# Altium PCB UmbilicalBoardV4.PcbDoc (part 1 of 2)
Units mm, origin at the board's own origin, x right, y up, seen from the top; angles counter-clockwise.
Board outline 89.1 x 92.94 mm, 4 copper layers (Top Layer, GndPlane, PowerPlane, Bottom Layer), stack 0.107 mm thick; 73 components, 81 nets, 472 pads, 101 vias.
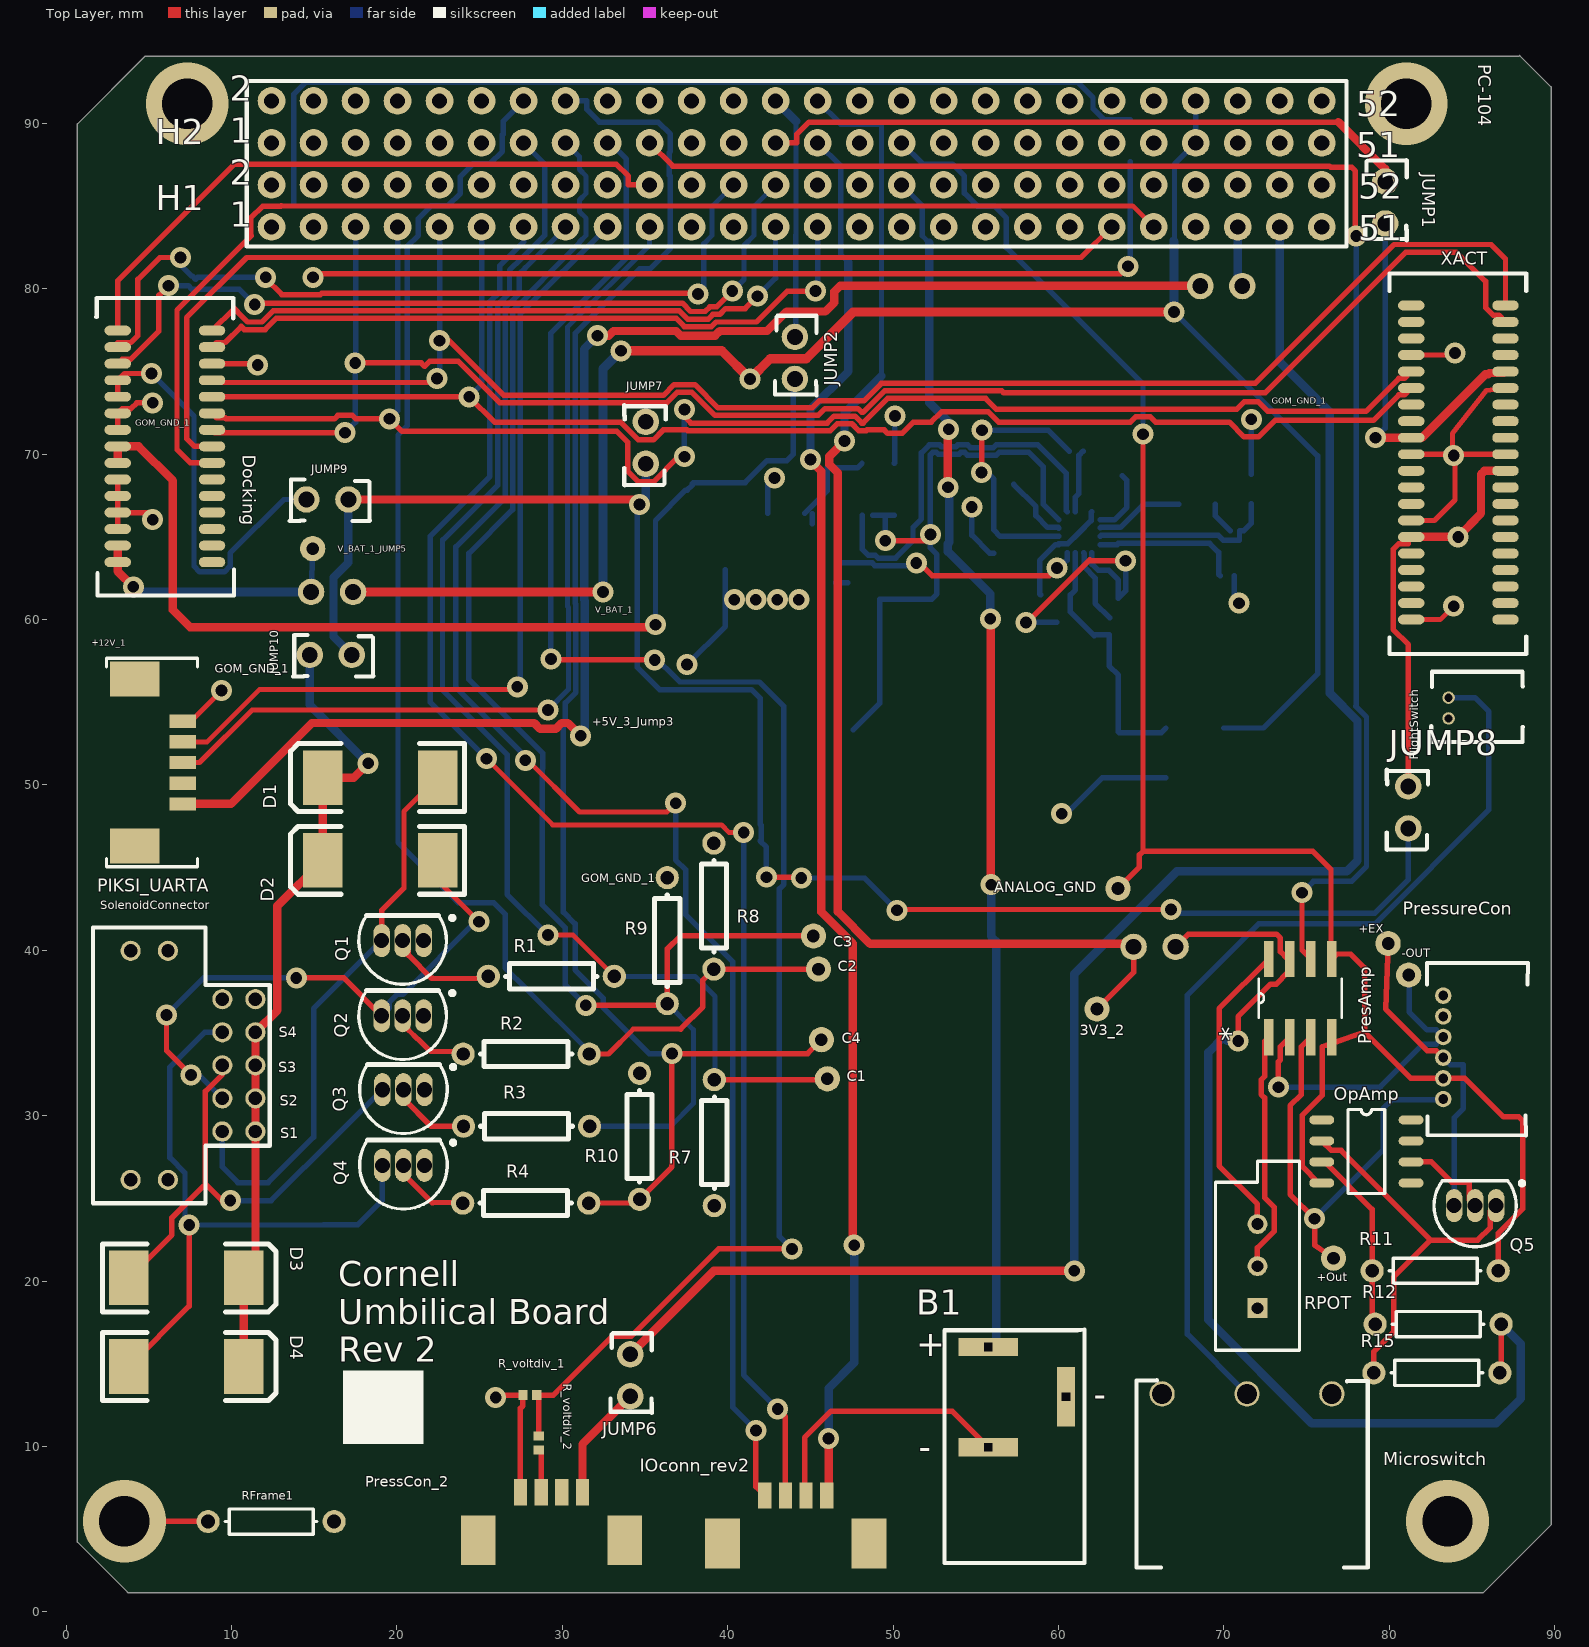
[diagram p0: Top Layer view]
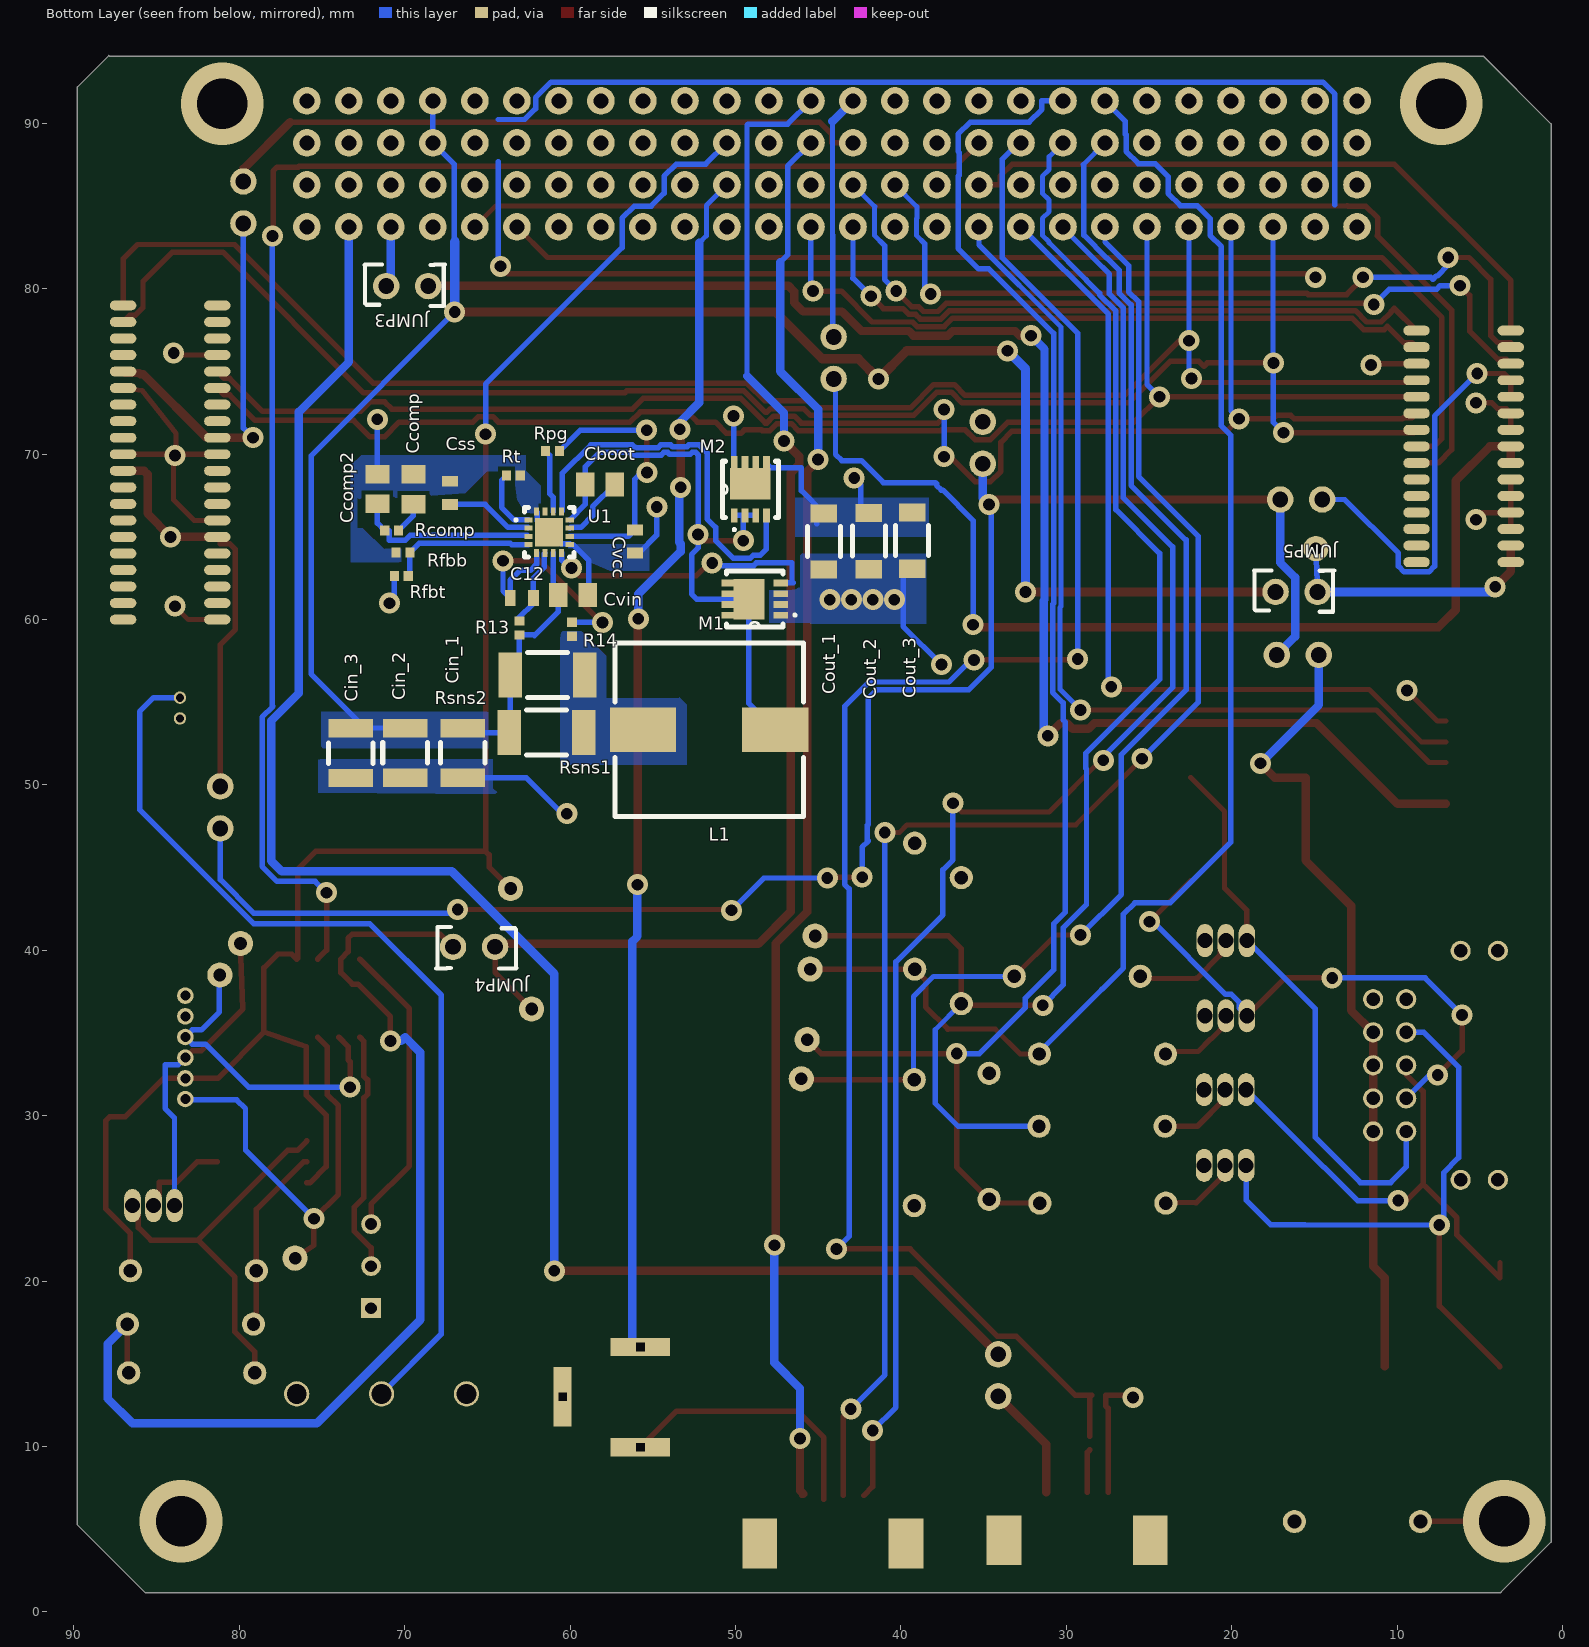
[diagram p1: Bottom Layer view, seen from below]
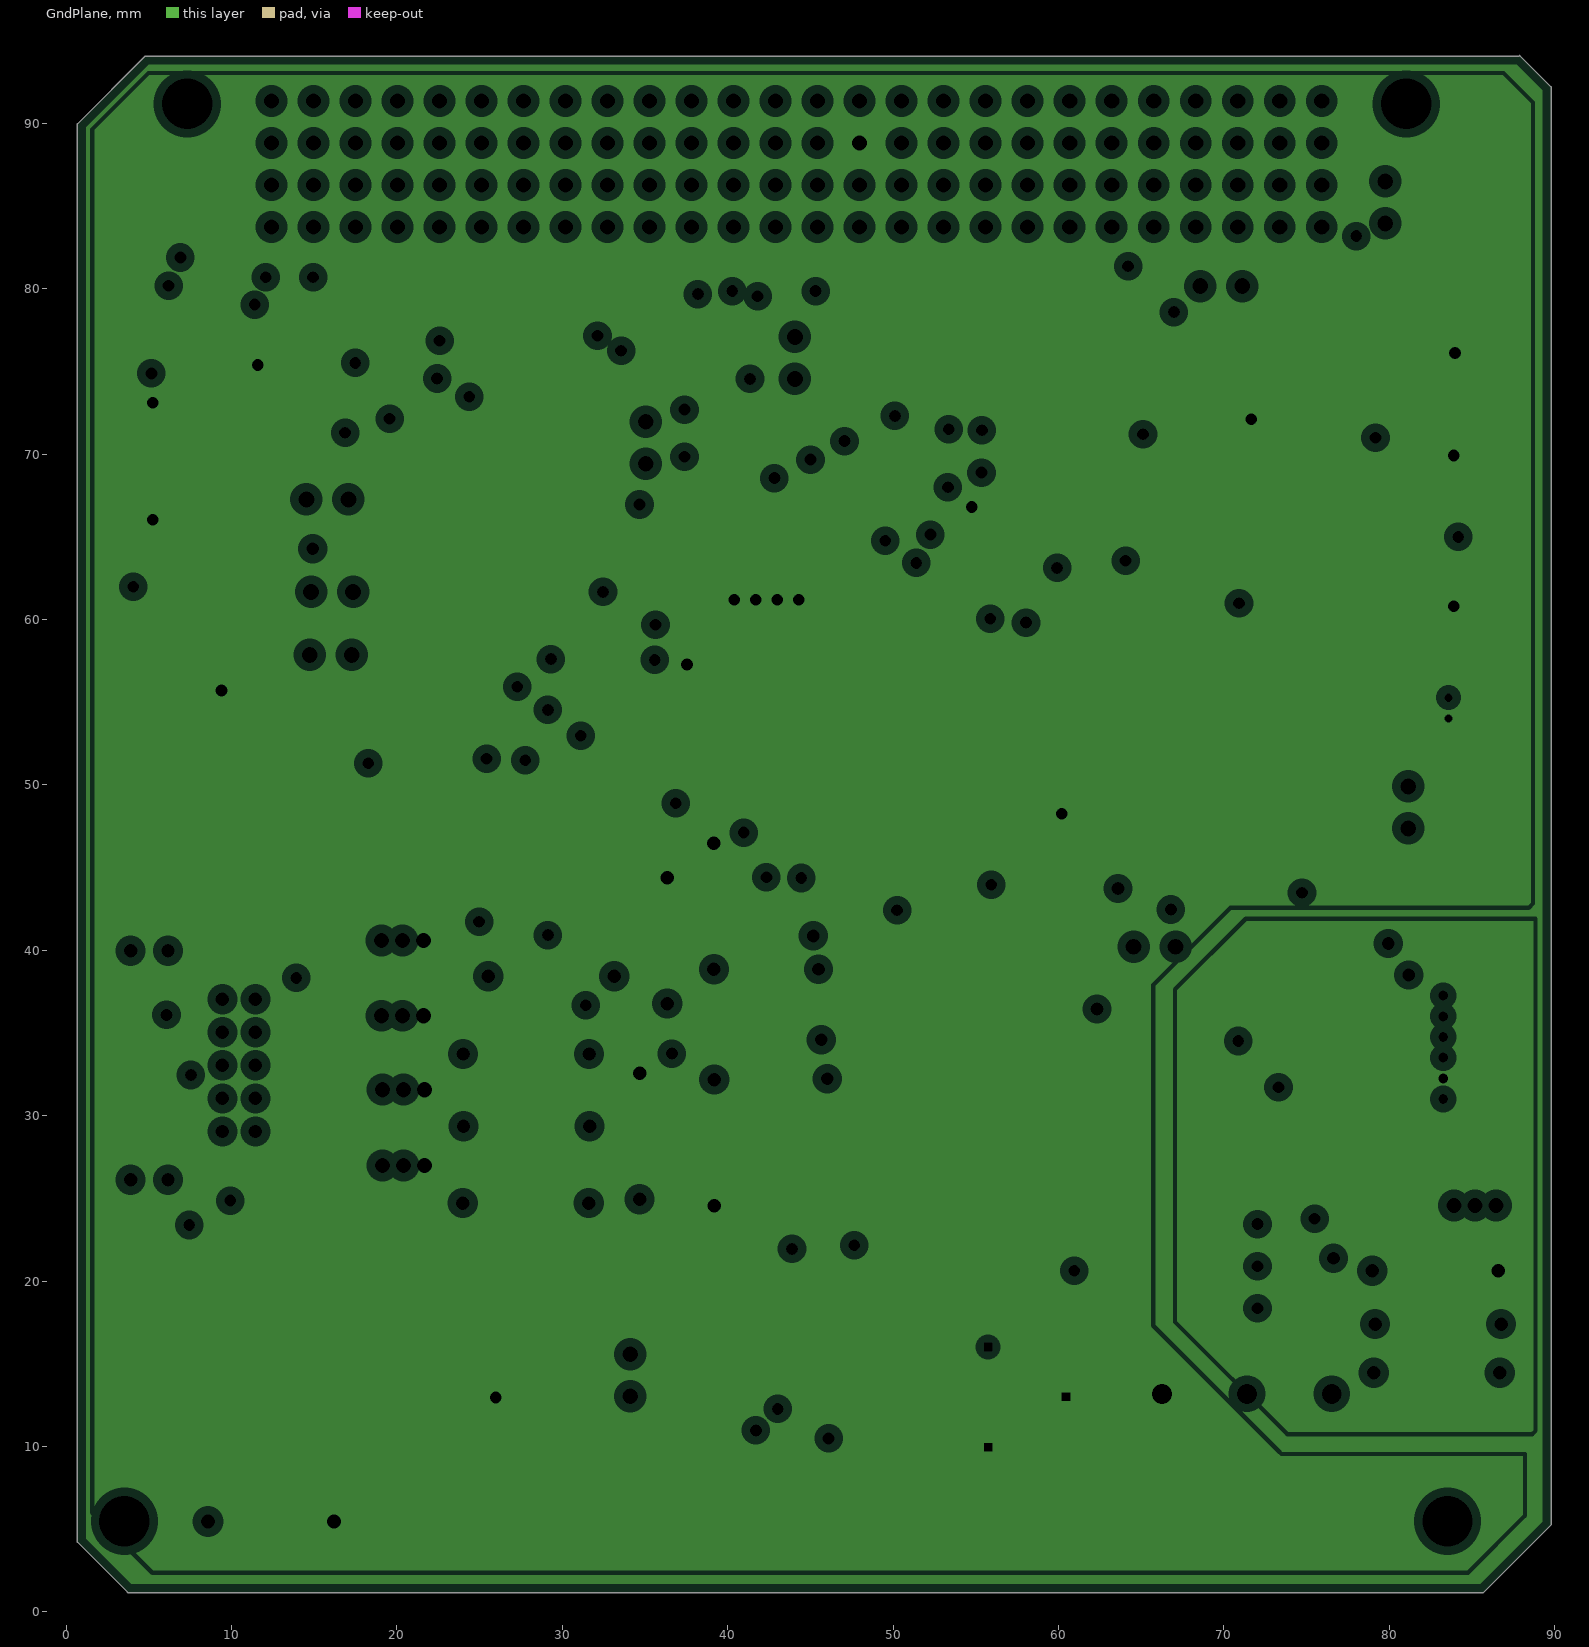
[diagram p2: GndPlane, clearances drawn from the general rule]
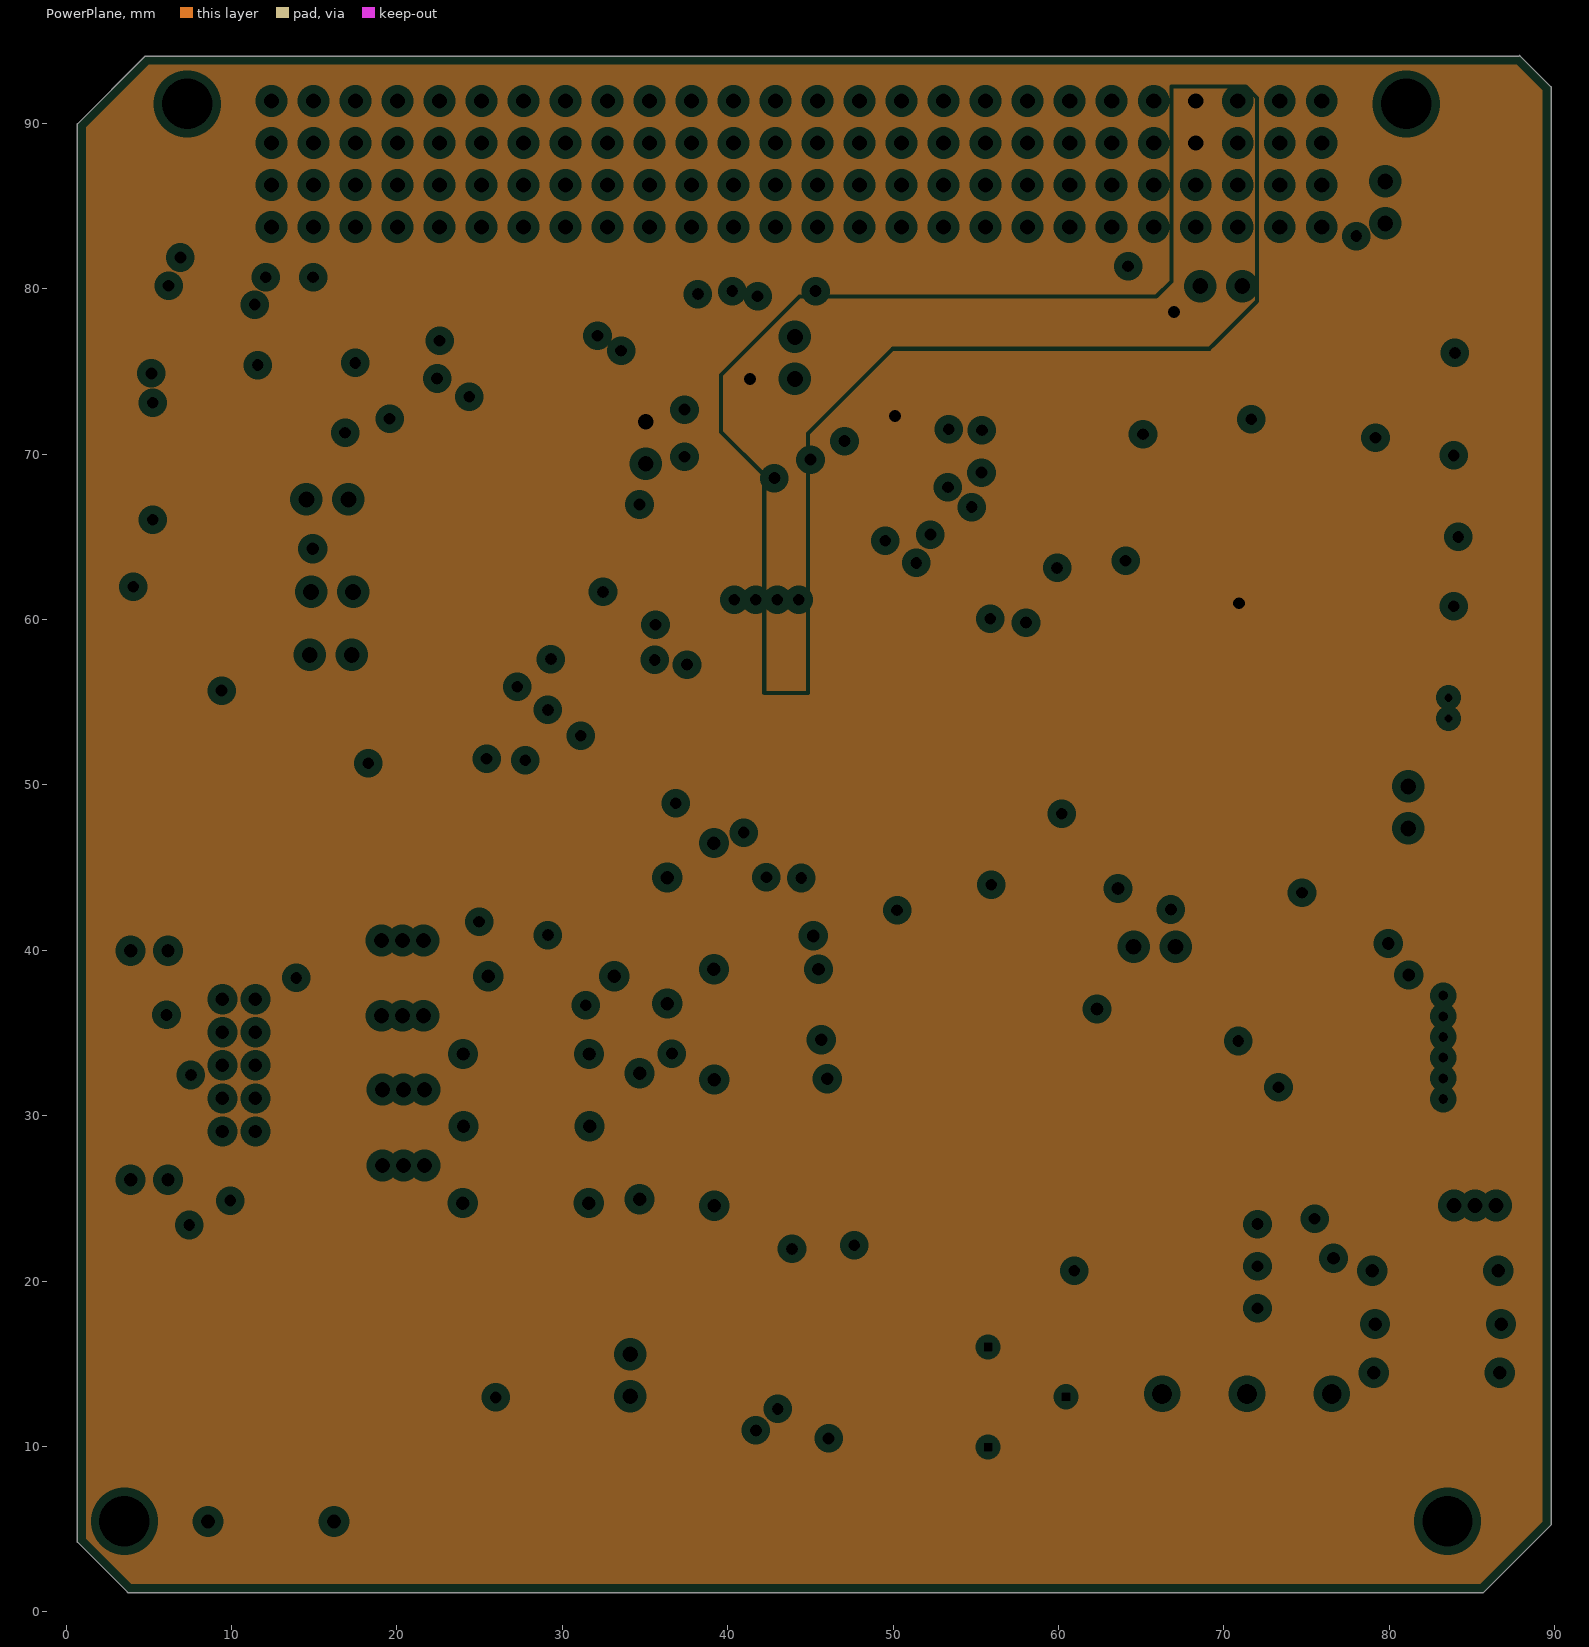
[diagram p3: PowerPlane, clearances drawn from the general rule]

## Layer stack, top to bottom
Top Solder: solder mask 0.0102, Solder Resist, Dk 3.5
Top Layer: signal copper 0.0356
GndPlane: plane copper 0.0178, net (Multiple Nets)
PowerPlane: plane copper 0.0178, net (Multiple Nets)
Bottom Layer: signal copper 0.0356
Bottom Solder: solder mask 0.0102, Solder Resist, Dk 3.5

## Board outline
4.775,94.056 0.686,89.967 0.686,4.216 3.708,1.194 3.734,1.168 84.506,1.168 85.7,1.168 89.789,5.258 89.789,91.821 89.789,92.202 87.884,94.107 87.833,94.056 4.801,94.056

## Design rules (kind name [scope] priority, off if disabled: settings)
Clearance [All] p1: gap=0.254 ignorepadtopadclearanceinfootprint=FALSE except(0: Arc-Hole Track-Hole SMDPad-Hole THPad-Hole Via-Hole Fill-Hole Poly-Hole Region-Hole Text-Hole; 0.127: Track-Track Track-SMDPad Track-THPad SMDPad-SMDPad SMDPad-THPad THPad-THPad)
HoleSize [All] p1: absolutevalues=TRUE maxlimit=3.048 minlimit=0.025 maxpercent=80.000 minpercent=20.000
MinimumSolderMaskSliver [All] p1: minsoldermaskwidth=0.127
PlaneClearance [All] p1: clearance=0.508
PlaneConnect [All] p1: planeconnectstyle=Direct reliefexpansion=0.508 reliefentries=4 reliefconductorwidth=0.254 reliefairgap=0.254
PolygonConnect [All] p1: connectstyle=Direct reliefconductorwidth=0.254 reliefentries=4 polygonreliefangle="90 Angle" airgapwidth=0.254
RoomDefinition PressureSensor [InComponentClass('PressureSensor')] p1: confinementstyle=ConfineIn formatcopy=TRUE lockcomponents=FALSE outline 89.052,42.266 88.603,41.829 69.001,41.829 69.001,13.746 68.631,13.386 88.947,13.386
RoomDefinition U_6Amp_DCDC [InComponentClass('U_6Amp_DCDC')] p2: confinementstyle=ConfineIn formatcopy=TRUE lockcomponents=FALSE outline 77.171,44.348 61.779,44.348 58.502,47.625 43.618,47.625 43.618,56.998 43.719,57.099 43.618,57.201 38.055,57.201 38.055,67.539 37.953,67.64 41.408,71.095 74.453,71.095 74.453,55.575 77.12,52.908 77.12,52.349
RoomDefinition SolSwitch [InComponentClass('SolSwitch')] p3: confinementstyle=ConfineIn formatcopy=TRUE lockcomponents=FALSE outline 1.499,41.672 1.499,11.989 15.606,11.989 15.606,23.393 42.677,23.393 42.677,47.388 42.799,47.519 25.068,47.519 25.068,54.762 11.301,54.762 11.301,41.804 11.422,41.672
RoutingVias [All] p1: holewidth=0.711 width=1.27 viastyle="Through Hole" minholewidth=0.711 minwidth=1.27 maxholewidth=0.711 maxwidth=1.27
SolderMaskExpansion [All] p1: expansion=0.102
Width [All] p1: maxlimit=0.559 minlimit=0.305 preferedwidth=0.33
26 further rules are at their usual default settings.

## Classes and differential pairs
component class "Barrel Jack": B1
component class U_PressureConnector_2: PressCon_2 R_Voltdiv_1 R_Voltdiv_2
component class U_Jumpers_rev2: JUMP1 JUMP2 JUMP3 JUMP4 JUMP5 JUMP6 JUMP7 JUMP8 JUMP9 JUMP10
component class U_6Amp_DCDC: C12 Cboot Ccomp Ccomp2 Cin_1 Cin_2 Cin_3 Cout_1 Cout_2 Cout_3 Css Cvcc Cvin Isource L1 M1 M2 R13 R14 Rcomp Rfbb Rfbt Rpg Rsns1 Rsns2 Rt U1
component class SolSwitch: D1 D2 D3 D4 Q1 Q2 Q3 Q4 R1 R2 R3 R4 R7 R8 R9 R10 SolenoidConnector
component class Umbilical104: PC-104
component class Switch: FlightSwitch Microswitch
component class Docking: Docking
component class U_IOconnector: IOconn_rev2
component class XACT: XACT
component class PIKSI_UARTA: PIKSI_UARTA
component class PressureSensor: OpAmp PresAmp PressureCon Q5 R11 R12 R15 RPOT

## Components (designator, comment, footprint, x,y, rotation, side; value= is the part's Value field where it differs from the comment)
B1 "Barrel_Jack" Barrel_Jack 55.753,9.957 r0 top
C12 "06035A101JAT2A" 0603 62.922,61.29 r180 bottom
Cboot "08053C104KAT2A" 0805 58.191,68.174 r180 bottom
Ccomp "CC0805KRX7R9BB47" 0805 69.475,67.869 r90 bottom
Ccomp2 "CC0805JRNPO9BN22" 0805 71.659,67.894 r90 bottom
Cin_1 "C3225X6S1C226M" 1210 66.503,51.943 r270 bottom
Cin_2 "C3225X6S1C226M" 1210 69.983,51.943 r270 bottom
Cin_3 "C3225X6S1C226M" 1210 73.259,51.918 r270 bottom
Cout_1 "C3216X5R1E476M16" 1206_190 44.653,64.719 r270 bottom
Cout_2 "C3216X5R1E476M16" 1206_190 41.935,64.745 r270 bottom
Cout_3 "C3216X5R1E476M16" 1206_190 39.319,64.77 r270 bottom
Css "GRM188R71E472KA0" 0603 67.265,67.666 r270 bottom
Cvcc "GRM188R61C106MA7" 0603 56.089,64.719 r270 bottom
Cvin "08053C104KAT2A" 0805 59.823,61.493 r180 bottom
D1 "Diode" SMC 18.999,50.444 r180 top
D2 "Diode" SMC 18.999,45.441 r180 top
D3 "Diode" SMC 7.264,20.193 r0 top
D4 "Diode" SMC 7.264,14.834 r0 top
Docking "Docking_Molex_30Pin" DOCKING_MOLEX_30PIN 3.124,77.47 r270 top
FlightSwitch "RemoverBeforeFlightSwitch" "REMOVERBEFOREFLIGHT SWITCH" 83.591,52.07 r90 top
IOconn_rev2 "IOconn_rev2" IOCONN_REV2 42.24,7.036 r0 top
JUMP1 "Jumper(DIP2)" JUMPER(DIP2) 79.756,86.487 r270 top
JUMP2 "Jumper(DIP2)" JUMPER(DIP2) 44.069,77.089 r270 top
JUMP3 "Jumper(DIP2)" JUMPER(DIP2) 71.12,80.162 r180 bottom
JUMP4 "Jumper(DIP2)" JUMPER(DIP2) 64.541,40.208 r0 bottom
JUMP5 "Jumper(DIP2)" JUMPER(DIP2) 17.348,61.671 r180 bottom
JUMP6 "Jumper(DIP2)" JUMPER(DIP2) 34.112,15.57 r270 top
JUMP7 "Jumper(DIP2)" Jumper(DIP2) 35.052,69.418 r90 top
JUMP8 "Jumper(DIP2)" Jumper(DIP2) 81.153,47.371 r90 top
JUMP9 "Jumper(DIP2)" Jumper(DIP2) 17.069,67.259 r180 top
JUMP10 "Jumper(DIP2)" Jumper(DIP2) 17.272,57.861 r180 top
L1 "MLC1255-122MLB" MLC1255 51.593,53.34 r180 bottom
M1 "CSD16323Q3" TRANS_NexFET_Q3 48.844,61.239 r0 bottom
M2 "CSD16340Q3" TRANS_NexFET_Q3 49.098,67.869 r90 bottom
Microswitch "MicroSwitch" MICROSWITCH_3PIN 71.45,13.233 r180 top locked
OpAmp "UA741" UA741 75.921,29.743 r0 top
PC-104 "PC-104" ? 12.421,83.744 r0 top locked
PIKSI_UARTA "PIKSI_UART Connector" "MOLEX PICOBLADE 5 PIN" 2.642,57.455 r270 top
PresAmp "AD627ARZ" R_8 74.625,37.109 r90 top
PressCon_2 "PressureConn_2" PRESSCON_2 26.797,6.579 r0 top
PressureCon "PressureConnector" "PRESSURE CONNECTOR" 82.067,33.884 r90 top
Q1 "MOSFET" TO-226-AA 20.345,40.589 r90 top
Q2 "MOSFET" TO-226-AA 20.345,36.043 r90 top
Q3 "MOSFET" TO-226-AA 20.396,31.572 r90 top
Q4 "MOSFET" TO-226-AA 20.396,27 r90 top
Q5 "2N3906" TO-92A 85.192,24.562 r90 top
R1 "100" AXIAL-0.3#1 29.337,38.43 r180 top
R2 "100" AXIAL-0.3#1 27.813,33.731 r180 top
R3 "100" AXIAL-0.3#1 27.838,29.362 r180 top
R4 "100" AXIAL-0.3#1 27.788,24.714 r180 top
R7 "10k" AXIAL-0.3#1 39.192,28.372 r90 top
R8 "10k" AXIAL-0.3#1 39.167,42.672 r270 top
R9 "10k" AXIAL-0.3#1 36.347,40.589 r270 top
R10 "10k" AXIAL-0.3#1 34.671,28.753 r270 top
R11 "1000" AXIAL-0.3#1 82.779,20.625 r0 top
R12 "1000" AXIAL-0.3#1 82.956,17.399 r180 top
R13 "CRCW040210R0FKED" 0402 63.068,59.487 r90 bottom
R14 "CRCW040210R0FKED" 0402 59.899,59.411 r90 bottom
R15 "1000" AXIAL-0.3#1 82.88,14.453 r180 top
R_voltdiv_1 "3K" 0402 28.042,13.106 r0 top
R_voltdiv_2 "1090" 0402 28.575,10.211 r90 top
Rcomp "CRCW04029K53FKED" 0402 70.796,65.38 r180 bottom
Rfbb "CRCW040211K0FKED" 0402 70.104,64.059 r0 bottom
Rfbt "CRCW040297K6FKED" 0402 70.206,62.636 r180 bottom
RFrame1 "Rframe" AXIAL-0.3#2 12.395,5.461 r180 top (schematic designator RFrame)
Rpg "CRCW0402100KFKED" 0402 61.067,70.18 r0 bottom
RPOT "100K" VR5 72.034,20.904 r90 top
Rsns1 "PMR100HZPFU6L00" 2512 61.423,53.162 r0 bottom
Rsns2 "PMR100HZPFU6L00" 2512 61.372,56.642 r0 bottom
Rt "CRCW0402107KFKED" 0402 63.43,68.707 r180 bottom
SolenoidConnector "T2M-105-01-X-D-RA-WT" T2M-105-01-X-D-RA-WT 9.449,33.045 r90 top
U1 "TPS43061RTER" S-PVQFN-N16 61.271,65.278 r180 bottom
XACT "XACT_Molex_40Pin" XACT_MOLEX_40PIN 81.331,78.994 r270 top

## Footprints (in the part's own frame and the unit in brackets; to place one, negate y for a bottom-side part, rotate by r counter-clockwise, add the part's x,y. Pads: shape width x height; smd on the part's side, far side on the other; paste and mask are expansions set on the pad)
0402 [mil]
  rect 22x24 smd: 1(-16.5,0) 2(16.5,0)
0603 [mil]
  rect 26x38 smd: 1(-27.5,0) 2(27.5,0)
0805 [mil]
  rect 44x57 smd: 1(-35.5,0) 2(35.5,0)
1206_190 [mm]
  rect 1.1x1.6 smd paste+0 mask+0.051: 1(-1.7,0) 2(1.7,0)
  silkscreen extent -0.9,-1 0.9,1
1210 [mil]
  rect 44x106 smd: 1(-59,0) 2(59,0)
  silkscreen extent -24,-53 24,53
2512 [mil]
  rect 56x107 smd: 1(-88.5,0) 2(88.5,0)
  silkscreen extent -47,-54 47,53
AXIAL-0.3#1 [mm] "Axial Device, Thru-Hole; 2 Leads; 0.3 in Pin Spacing"
  round 1.4 hole 0.813: 1(-3.81,0) 2(3.81,0)
  silkscreen extent -2.77,-0.76 2.77,0.76
AXIAL-0.3#2 [mm] "Axial Device, Thru-Hole; 2 Leads; 0.3 in Pin Spacing"
  round 1.4 hole 0.85: 1(-3.81,0) 2(3.81,0)
  silkscreen extent -2.77,-0.76 2.77,0.76
Barrel_Jack [mm] "KLDX-0202-B"
  rect 3.6x1.1 hole 0.5 square: 0(0,0) 2(0,6.05)
  rect 1.1x3.6 hole 0.5 square: 1(4.7,3.05)
  silkscreen extent -2.65,-7 5.82,7.12
DOCKING_MOLEX_30PIN [mm] "501571-3007"
  oval 0.6x1.6 smd: A1(0,0) A2(1,0) A3(2,0) A4(3,0) A5(4,0) A6(5,0) A7(6,0) A8(7,0) A9(8,0) A10(9,0) A11(10,0) A12(11,0) A13(12,0) A14(13,0) A15(14,0) A16(0,5.7) A17(1,5.7) A18(2,5.7) A19(3,5.7) A20(4,5.7) A21(5,5.7) A22(6,5.7) A23(7,5.7) A24(8,5.7) A25(9,5.7) A26(10,5.7) A27(11,5.7) A28(12,5.7) A29(13,5.7) A30(14,5.7)
  oval 0.6x1.6 smd far side: B1(0,0) B2(1,0) B3(2,0) B4(3,0) B5(4,0) B6(5,0) B7(6,0) B8(7,0) B9(8,0) B10(9,0) B11(10,0) B12(11,0) B13(12,0) B14(13,0) B15(14,0) B16(0,5.7) B17(1,5.7) B18(2,5.7) B19(3,5.7) B20(4,5.7) B21(5,5.7) B22(6,5.7) B23(7,5.7) B24(8,5.7) B25(9,5.7) B26(10,5.7) B27(11,5.7) B28(12,5.7) B29(13,5.7) B30(14,5.7)
  silkscreen extent -1.97,-1.3 16.02,7.02, body extent -1.97,-1.27 16.02,6.98, height 2.95
IOCONN_REV2 [mm] "Molex 4 Pin Picoblade. Part # 53261-0471"
  rect 0.8x1.6 smd: 1(0,0) 2(1.25,0) 3(2.5,0) 4(3.75,0)
  rect 2.1x3 all layers, no hole: 5(-2.55,-2.9) 6(6.3,-2.9)
  body extent -3.22,-4.47 6.93,0.73, height 1.7
JUMPER(DIP2) [mm] "S1012E-02-ND (Pin), 3M9580-ND (Jumper)"
  round 1.6 hole 0.95: 1(0,0) 2(2.54,0)
  silkscreen extent -1.3,-1.2 3.55,1.3
Jumper(DIP2) [mm] "S1012E-02-ND (Pin), 3M9580-ND (Jumper)"
  round 1.6 hole 0.95: 1(0,0) 2(2.54,0)
  silkscreen extent -1.3,-1.2 3.55,1.3
MICROSWITCH_3PIN [mm] "Omron Electronics Inc-EMC Div D2FS-FL-N-A1"
  round 1.524 hole 1.2: 1(-5.08,0.05) 2(0.05,0.05) 3(5.18,0.05)
  silkscreen extent -7.25,-0.77 6.73,10.55, body extent -7.25,-0.75 6.73,10.55
MLC1255 [mil]
  rect 157.5x106 smd: 1(-157.25,0) 2(157.25,0)
  silkscreen extent -224,-206 225,207
"MOLEX PICOBLADE 5 PIN" [mm] "Molex Picoblade Header, SMT, Right Angle  53261-0571"
  rect 0.8x1.6 smd: 0(3.6,4.4) 1(4.85,4.4) 2(6.1,4.4) 3(7.35,4.4) 4(8.6,4.4)
  rect 2.1x3 smd: 5(1.05,1.5) 6(11.15,1.5)
  silkscreen extent -0.2,-0.2 12.4,5.3, body extent 0.4,0 11.8,5.2, height 3.4
PRESSCON_2 [mm] "Molex Picoblade 4 pin (for the second pressure conn) Part # 53261-0471"
  rect 0.8x1.6 smd: 1(0.675,0.65) 2(1.925,0.65) 3(3.175,0.65) 4(4.425,0.65)
  rect 2.1x3 all layers, no hole: 5(-1.875,-2.25) 6(6.975,-2.25)
  body extent -2.55,-3.82 7.6,1.38, height 1.7
"PRESSURE CONNECTOR" [mm] "53048-0610"
  round 1 hole 0.6 mask+0.076: 1(-2.875,-1.2) 2(-1.625,-1.2) 3(-0.375,-1.2) 4(0.875,-1.2) 5(2.125,-1.2) 6(3.375,-1.2)
  silkscreen extent -5.07,-6.32 5.35,-0.23, body extent -4.45,-6.08 4.8,-0.58, height 1.75
R_8 [mil]
  rect 86x22 smd: 1(-93,75) 2(-93,25) 3(-93,-25) 4(-93,-75) 5(93,-75) 6(93,-25) 7(93,25) 8(93,75)
  silkscreen extent -46,-98 46,98
"REMOVERBEFOREFLIGHT SWITCH" [mm] "Molex Picoblade Part Number: 53048-0210"
  round 0.75 hole 0.5: 1(1.95,0) 2(3.205,0)
  silkscreen extent 0.53,-4.5 4.78,1.05, body extent 0.53,-4.47 4.78,1.03, height 4.05
S-PVQFN-N16 [mm]
  rect 0.5x0.3 smd: 1(-1.25,0.75) 2(-1.25,0.25) 3(-1.25,-0.25) 4(-1.25,-0.75) 9(1.25,-0.75) 10(1.25,-0.25) 11(1.25,0.25) 12(1.25,0.75)
  rect 0.3x0.5 smd: 5(-0.75,-1.25) 6(-0.25,-1.25) 7(0.25,-1.25) 8(0.75,-1.25) 13(0.75,1.25) 14(0.25,1.25) 15(-0.25,1.25) 16(-0.75,1.25)
  rect 1.7x1.7 smd paste-0.837: 17(0,0)
  silkscreen extent -2.08,-1.5 1.5,1.5
SMC [mm] "DO-214-AB/SMC; 2 C-Bend Leads; Body 7.9 x 5.9 mm, inc. leads (LxW)"
  rect 2.4x3.3 smd: 1(-3.475,0) 2(3.475,0)
  silkscreen extent -5.08,-2.05 5.42,2.06
T2M-105-01-X-D-RA-WT [mm]
  round 1.22 hole 0.813 mask+0.075: 1(-4,-2) 2(-4,0) 3(-2,-2) 4(-2,0) 5(0,-2) 6(0,0) 7(2,-2) 8(2,0) 9(4,-2) 10(4,0) W1(-6.925,5.55) W2(6.925,5.55) W3(-6.925,3.29) W4(6.925,3.29)
  silkscreen extent -8.33,-2.86 8.33,7.82, body extent -7.28,-2.17 8.4,7.39, height 7.45
TO-92A [mm] "TO, Flat Index; 3 In-Line, Axial Leads; Body Dia. 4.5mm; Leads 0.51 x 0.48 mm (max)"
  oval 2x1 hole 0.914: 1(0,-1.27) 2(0,0) 3(0,1.27)
  silkscreen extent -2.48,-2.96 1.5,2.48, body extent -2.48,-2.5 1.5,2.5, height 6.86
TO-226-AA [mm] "TO, Flat Index; 3 In-Line, Axial Leads; Body Dia. 4.8mm; Leads 0.55 x 0.51 mm (max)"
  oval 2x1 hole 0.914: 1(0,-1.27) 2(0,0) 3(0,1.27)
  silkscreen extent -2.65,-3.13 1.52,2.65, body extent -2.65,-2.66 1.52,2.66, height 5.33
TRANS_NexFET_Q3 [mil]
  rect 34x16 smd: 1(-62,38.39) 2(-62,12.8) 3(-62,-12.8) 4(-62,-38.39) 5(62,-38.39) 6(62,-12.8) 7(62,12.8) 8(62,38.39)
  rect 74.8x96.46 smd: 9(13.46,0)
  Top Layer region: 67,0 67,0 67,0 67,0
  silkscreen extent -99,-67 67,67
UA741 [mm]
  oval 1.5x0.55 smd: 1(0,0) 2(0,-1.27) 3(0,-2.54) 4(0,-3.81) 5(5.4,-3.81) 6(5.4,-2.54) 7(5.4,-1.27) 8(5.4,0)
  silkscreen extent 1.58,-4.44 3.82,0.64
VR5 [mm] "Thru-Hole; 3 Leads"
  rect 1.2x1.2 hole 0.711: 1(-2.54,0)
  round 1.2 hole 0.711: 2(0,0) 3(2.54,0)
  silkscreen extent -5.08,-2.54 6.35,2.54
XACT_MOLEX_40PIN [mm] "501571-4007"
  oval 0.6x1.6 smd: A1(0,0) A2(1,0) A3(2,0) A4(3,0) A5(4,0) A6(5,0) A7(6,0) A8(7,0) A9(8,0) A10(9,0) A11(10,0) A12(11,0) A13(12,0) A14(13,0) A15(14,0) A16(15,0) A17(16,0) A18(17,0) A19(18,0) A20(19,0) A21(0,5.7) A22(1,5.7) A23(2,5.7) A24(3,5.7) A25(4,5.7) A26(5,5.7) A27(6,5.7) A28(7,5.7) A29(8,5.7) A30(9,5.7) A31(10,5.7) A32(11,5.7) A33(12,5.7) A34(13,5.7) A35(14,5.7) A36(15,5.7) A37(16,5.7) A38(17,5.7) A39(18,5.7) A40(19,5.7)
  oval 0.6x1.6 smd far side: B1(0,0) B2(1,0) B3(2,0) B4(3,0) B5(4,0) B6(5,0) B7(6,0) B8(7,0) B9(8,0) B10(9,0) B11(10,0) B12(11,0) B13(12,0) B14(13,0) B15(14,0) B16(15,0) B17(16,0) B18(17,0) B19(18,0) B20(19,0) B21(0,5.7) B22(1,5.7) B23(2,5.7) B24(3,5.7) B25(4,5.7) B26(5,5.7) B27(6,5.7) B28(7,5.7) B29(8,5.7) B30(9,5.7) B31(10,5.7) B32(11,5.7) B33(12,5.7) B34(13,5.7) B35(14,5.7) B36(15,5.7) B37(16,5.7) B38(17,5.7) B39(18,5.7) B40(19,5.7)
  silkscreen extent -1.92,-1.32 21.08,6.95, body extent -1.85,-1.35 21.15,6.9, height 2.95
? [mm] "ESQ-126-14-G-D"
  round 1.676 hole 0.914 mask+0.076: H1_1(0,0) H1_2(0,2.54) H1_3(2.54,0) H1_4(2.54,2.54) H1_5(5.08,0) H1_6(5.08,2.54) H1_7(7.62,0) H1_8(7.62,2.54) H1_9(10.16,0) H1_10(10.16,2.54) H1_11(12.7,0) H1_12(12.7,2.54) H1_13(15.24,0) H1_14(15.24,2.54) H1_15(17.78,0) H1_16(17.78,2.54) H1_17(20.32,0) H1_18(20.32,2.54) H1_19(22.86,0) H1_20(22.86,2.54) H1_21(25.4,0) H1_22(25.4,2.54) H1_23(27.94,0) H1_24(27.94,2.54) H1_25(30.48,0) H1_26(30.48,2.54) H1_27(33.02,0) H1_28(33.02,2.54) H1_29(35.56,0) H1_30(35.56,2.54) H1_31(38.1,0) H1_32(38.1,2.54) H1_33(40.64,0) H1_34(40.64,2.54) H1_35(43.18,0) H1_36(43.18,2.54) H1_37(45.72,0) H1_38(45.72,2.54) H1_39(48.26,0) H1_40(48.26,2.54) H1_41(50.8,0) H1_42(50.8,2.54) H1_43(53.34,0) H1_44(53.34,2.54) H1_45(55.88,0) H1_46(55.88,2.54) H1_47(58.42,0) H1_48(58.42,2.54) H1_49(60.96,0) H1_50(60.96,2.54) H1_51(63.5,0) H1_52(63.5,2.54) H2_1(0,5.08) H2_2(0,7.62) H2_3(2.54,5.08) H2_4(2.54,7.62) H2_5(5.08,5.08) H2_6(5.08,7.62) H2_7(7.62,5.08) H2_8(7.62,7.62) H2_9(10.16,5.08) H2_10(10.16,7.62) H2_11(12.7,5.08) H2_12(12.7,7.62) H2_13(15.24,5.08) H2_14(15.24,7.62) H2_15(17.78,5.08) H2_16(17.78,7.62) H2_17(20.32,5.08) H2_18(20.32,7.62) H2_19(22.86,5.08) H2_20(22.86,7.62) H2_21(25.4,5.08) H2_22(25.4,7.62) H2_23(27.94,5.08) H2_24(27.94,7.62) H2_25(30.48,5.08) H2_26(30.48,7.62) H2_27(33.02,5.08) H2_28(33.02,7.62) H2_29(35.56,5.08) H2_30(35.56,7.62) H2_31(38.1,5.08) H2_32(38.1,7.62) H2_33(40.64,5.08) H2_34(40.64,7.62) H2_35(43.18,5.08) H2_36(43.18,7.62) H2_37(45.72,5.08) H2_38(45.72,7.62) H2_39(48.26,5.08) H2_40(48.26,7.62) H2_41(50.8,5.08) H2_42(50.8,7.62) H2_43(53.34,5.08) H2_44(53.34,7.62) H2_45(55.88,5.08) H2_46(55.88,7.62) H2_47(58.42,5.08) H2_48(58.42,7.62) H2_49(60.96,5.08) H2_50(60.96,7.62) H2_51(63.5,5.08) H2_52(63.5,7.62)
  silkscreen extent -1.5,-1.19 65,8.81

## Part data
C12 Cboot Ccomp Ccomp2 Cin_1 Cin_2 Cin_3 Cout_1 Cout_2 Cout_3 Css Cvcc Cvin L1 M1 M2 PresAmp R13 R14 Rcomp Rfbb Rfbt Rpg Rsns1 Rsns2 Rt U1: "Imported"
D1 D2 D3 D4: "Default Diode"
Docking: "24 Pin Connector"
FlightSwitch: "53048-0210 Molex Picoblade"
IOconn_rev2: "Part Number: 53261-0471"
Microswitch: "Omron Electronics Inc-EMC Div D2FS-FL-N-A1"
PC-104: "ESQ-126-14-G-D (2 total needed)"
PIKSI_UARTA: "Molex Picoblade 5 Pin"
PressureCon: "Molex 53261-0671"
Q1 Q2 Q3 Q4: library part MOSFET-N, "N-Channel MOSFET"
Q5: "PNP General Purpose Amplifier"
R1 R2 R3 R4 R7 R8 R9 R10: library part PMR100HZPFU6L00, "Imported"
R11 R12 R15: library part Res1, "Resistor- 696-1552-ND"
R_voltdiv_1 R_voltdiv_2: library part CRCW040210R0FKED, "Imported"
RFrame1: library part Res1, "Resistor -  CF14JT1M00CT-ND"
RPOT: library part RPot, "Potentiometer"
SolenoidConnector: "2MM PITCH SHROUDED RIGHT ANGLE TERMINAL STRIP."
XACT: "31 Pin Airborn Nano Connector"

## Free pads (board coordinates)
  round 1.524 hole 0.762: 2(14.91,64.287) 3(62.332,36.449) 3(63.602,43.739) 4(76.632,21.387) 5(79.934,40.411) 6(81.178,38.506) 10(46.025,32.233) 11(45.491,38.862) 12(45.669,34.595) 13(45.187,40.869)

## Via types
v1: diameter 1.27, hole 0.711, Top Layer to Bottom Layer, 97 vias
v2: diameter 5, hole 3.048, Top Layer to Bottom Layer, 4 vias

## Nets (pads, with @x,y where several pads share a name; then routed paths per layer and width w, separated by ;. In a path a pad name is that pad's centre, name@x,y a point inside that pad or via, vN(x,y) a via of type N, cw(c..) or ccw(c..) an arc to the next point about the centre after c; other vN are vias at no path point)
3V3_1: IOconn_rev2.4 PC-104.H2_27 | length 85.4
  Top Layer w0.33: IOconn_rev2.4@45.898,7.128 IOconn_rev2.4@45.99,7.036
  Top Layer w0.508: v1@44.958,69.672 45.669,68.961 45.669,42.316 47.574,40.411 47.574,22.25 v1(47.65,22.174) ; IOconn_rev2.4@45.898,7.128 46.101,7.331 v1(46.101,10.49)
  Bottom Layer w0.33: PC-104.H2_27@45.441,88.824 46.851,87.414 46.851,82.055 47.295,81.611
  Bottom Layer w0.508: v1(45.009,69.672) 45.009,72.72 47.295,75.006 47.295,81.611 ; v1(46.101,10.49) 46.101,13.513 47.65,15.062 v1(47.65,22.174)
3V3_2: JUMP4.1 pad.3@62.332,36.449 PC-104.H2_28 | length 76.9
  Top Layer w0.33: pad.3@62.332,36.449 64.541,38.659 JUMP4.1@64.541,40.208
  Top Layer w0.508: v1(47.066,70.79) 46.152,69.875 46.152,69.376 46.66,68.868 46.66,42.342 48.616,40.386 JUMP4.1@64.541,40.386
  Bottom Layer w0.305: 49.301,74.727 49.301,89.891
  Bottom Layer w0.33: PC-104.H2_28@45.441,91.364 46.851,89.954 49.238,89.954 49.301,89.891
  Bottom Layer w0.508: v1(47.066,70.79) 47.066,72.492 49.301,74.727
3V3_2_JUMP4: JUMP4.2 PresAmp.7 R12.1 R15.1 | length 63.1
  Top Layer w0.33: JUMP4.2@67.081,40.208 67.856,40.983 73.173,40.983 73.419,40.737 73.419,39.916 73.863,39.472 73.863,38.65 73.173,37.96 72.834,37.96 70.866,35.992 v1(70.866,34.519) ; R15.1@86.69,14.453 86.766,14.529 R12.1@86.766,17.399
  Bottom Layer w0.33: 70.209,34.519 v1(70.866,34.519)
  Bottom Layer w0.508: 70.209,34.519 69.98,34.747 69.063,33.829 69.063,17.655 75.313,11.405 86.462,11.405 87.96,12.903 87.96,16.205 R12.1@86.766,17.399
+5V_1: JUMP1.1 PC-104.H2_25 | length 39.6
  Top Layer w0.33: PC-104.H2_25@42.901,88.824 44.184,88.824 44.184,89.345 44.92,90.081 76.924,90.081 ; JUMP1.1@79.756,86.487 JUMP1.1@79.756,87.249
  Top Layer w0.508: 76.924,90.081 JUMP1.1@79.756,87.249
+5V_1_JUMP1: JUMP1.2 XACT.A9 XACT.A25 | length 22.7
  Top Layer w0.508: v1(79.172,70.994) 81.973,70.994 85.808,74.828 85.979,74.828 86.055,74.904 86.941,74.904 XACT.A25@87.031,74.994
  Bottom Layer w0.33: v1(79.172,70.994) 79.756,71.578 JUMP1.2@79.756,83.947
+5V_2: JUMP2.1 PC-104.H2_26 | length 14.8
  Bottom Layer w0.305: 44.138,83.221 44.145,83.228 44.145,90.119
  Bottom Layer w0.33: JUMP2.1@44.12,77.089 44.12,83.239
  Bottom Layer w0.508: PC-104.H2_26@42.901,91.364 44.145,90.119
+5V_2_JUMP2: Docking.A8 Docking.A9 JUMP2.2 | length 63.6
  Top Layer w0.508: Docking.A9@3.124,69.47 Docking.A8@3.124,70.47 4.384,70.47 6.452,68.402 6.452,60.579 7.493,59.538 v1@35.636,59.538
  Bottom Layer w0.33: v1(35.636,59.69) 35.636,65.989 37.465,67.818 37.553,67.818 37.846,68.111 37.846,68.199 37.922,68.275 41.054,68.275 42.388,69.609 43.574,69.609 43.955,69.99 43.955,74.435 JUMP2.2@44.069,74.549
+5V_3: JUMP3.1 PC-104.H1_47 | length 3.7
  Bottom Layer w0.33: JUMP3.1@70.841,80.442 JUMP3.1@71.12,80.162
  Bottom Layer w0.508: JUMP3.1@70.841,80.442 70.841,81.661 PC-104.H1_47@70.841,83.744
+5V_3_JUMP3: JUMP3.2 PIKSI_UARTA.4 | length 89.8
  Top Layer w0.508: PIKSI_UARTA.4@7.042,48.855 9.967,48.855 14.859,53.746 28.305,53.746 28.66,53.391 29.607,53.391 29.963,53.746 30.34,53.746 v1(31.115,52.972) ; v1(32.131,77.165) 32.817,77.165 33.096,77.445 36.881,77.445 37.16,77.165 39.243,77.165 39.523,77.445 42.386,77.445 43.567,78.626 45.91,78.626 46.457,79.172 46.457,79.832 46.812,80.188 JUMP3.2@68.58,80.188
  Bottom Layer w0.508: v1(31.115,52.972) 31.039,53.048 31.369,53.378 31.369,61.147 31.318,61.198 31.318,76.352 v1(32.131,77.165)
+5V_5: JUMP6.1 PC-104.H1_49 | length 107.1
  Top Layer w0.508: JUMP6.1@34.112,15.57 39.167,20.625 v1(60.96,20.625)
  Bottom Layer w0.508: v1(60.96,20.625) 60.96,38.583 67.158,44.78 77.445,44.78 78.08,45.415 78.08,53.873 76.403,55.55 76.403,72.554 73.381,75.577 PC-104.H1_49@73.381,83.744
+5V_5_JUMP6: JUMP6.2 PressCon_2.4 | length 7
  Top Layer w0.508: PressCon_2.4@31.222,7.229 31.222,10.14 JUMP6.2@34.112,13.03
+12V_1: JUMP7.1 JUMP8.1 JUMP9.1 JUMP10.1 | length 103.3
  Top Layer w0.33: v1(42.342,44.425) 44.399,44.425 v1(44.45,44.374) ; v1@50.317,42.469 v1(66.802,42.469)
  Top Layer w0.508: JUMP9.1@17.069,67.259 34.366,67.259 v1(34.671,66.954)
  Bottom Layer w0.33: v1(34.671,66.954) 34.531,66.815 34.531,57.12 35.885,55.766 41.44,55.766 41.961,55.245 41.961,47.617 42.024,47.554 42.024,46.68 41.961,46.617 42.342,46.236 v1(42.342,44.425) ; v1(44.45,44.374) 48.285,44.374 v1(50.241,42.418) ; v1(66.802,42.469) 67.016,42.255 79.132,42.255 81.153,44.276 JUMP8.1@81.153,47.371
  Bottom Layer w0.508: JUMP9.1@17.069,67.259 17.069,63.449 16.167,62.548 16.167,58.966 JUMP10.1@17.272,57.861 ; v1(34.671,66.954) 35.052,67.335 JUMP7.1@35.052,69.418
+12V_1_JUMP7: Cout_1.1 Cout_2.1 Cout_3.1 JUMP7.2 M2.5 M2.6 M2.7 M2.8 M2.9 Rfbt.1 | length 13.1
  Bottom Layer w0.33: Cout_2.1@42.434,66.419 42.434,68.164 v1(42.824,68.555) ; Cout_1.1@44.653,66.419 46.025,67.791 46.025,69.164 47.844,69.164 M2.5@48.123,69.444 ; 45.101,65.796 Cout_1.1@45.101,66.394 ; M2.8@50.073,69.444 50.114,69.485 v1(50.114,72.314) ; Rfbt.1@70.625,62.636 70.625,61.277 v1(70.917,60.985)
+12V_1_JUMP8: JUMP8.2 XACT.A15 XACT.A31 | length 25
  Top Layer w0.33: JUMP8.2@81.153,49.911 81.153,58.488 80.239,59.402 80.239,64.239 80.586,64.586 81.153,64.586 81.153,64.816 XACT.A15@81.331,64.994
  Top Layer w0.508: XACT.A15@81.331,64.994 v1(84.171,64.994) 85.547,66.421 85.547,68.783 85.758,68.994 XACT.A31@87.031,68.994
+12V_1_JUMP9: Docking.A4 Docking.A5 JUMP9.2 | length 25.3
  Top Layer w0.33: Docking.A5@3.124,73.47 Docking.A4@3.124,74.47 3.532,74.878 v1(5.156,74.879) v1(5.156,74.879)
  Bottom Layer w0.33: v1@5.347,75.07 5.347,74.689 7.732,72.303 7.732,63.225 8.079,62.878 9.569,62.878 9.916,63.225 9.916,64.012 13.164,67.259 JUMP9.2@14.529,67.259
+12V_1_JUMP10: D1.2 D2.2 D3.2 D4.2 JUMP10.2 SolenoidConnector.1 SolenoidConnector.3 SolenoidConnector.5 SolenoidConnector.7 | length 48.7
  Top Layer w0.508: D4.2@10.739,14.834 D3.2@10.739,20.193 11.449,20.902 SolenoidConnector.7@11.449,35.045 12.776,36.373 12.776,42.692 D2.2@15.524,45.441 D1.2@15.524,50.444 17.399,50.444 v1(18.263,51.308)
  Bottom Layer w0.508: JUMP10.2@14.732,57.861 14.732,54.839 v1(18.263,51.308)
ANALOGGND: OpAmp.4 pad.3@63.602,43.739 PC-104.H2_31 PresAmp.4 PresAmp.5 PressureCon.2 R11.2 | length 110.5
  Top Layer w0.33: pad.3@63.602,43.739 64.897,45.034 64.897,45.771 65.113,45.987 ; v1(65.113,71.209) 65.113,45.987 ; OpAmp.4@75.921,25.933 75.734,25.933 74.752,26.916 74.752,30.032 75.959,31.239 75.959,34.176 76.645,34.411 78.511,35.052 ; R11.2@86.589,20.625 86.589,22.889 88.086,24.387 88.086,29.682 87.841,29.928 86.912,29.928 84.581,32.259 PressureCon.2@83.267,32.259 81.305,32.259 78.511,35.052 ; 65.113,45.987 75.387,45.987 76.479,44.894 76.479,39.522 PresAmp.5@76.53,39.472 76.835,39.776 77.673,39.776 78.511,38.938 78.511,35.052
  Bottom Layer w0.33: PC-104.H2_31@50.521,88.824 51.804,87.541 53.581,87.541 54.318,86.805 54.318,85.789 55.106,85.001 56.121,85.001 56.858,84.265 56.858,82.487 65.113,74.232 v1(65.113,71.209)
BAT_CHARGE: B1.2 PC-104.H1_32 | length 72.6
  Top Layer w0.508: v1@53.264,71.425 53.34,71.501 v1(53.365,71.501) ; v1(53.315,67.996) v1@53.315,71.374 ; v1@55.905,44.018 v1@55.905,59.995
  Bottom Layer w0.305: PC-104.H1_32@50.521,86.284 51.765,85.039 51.765,83.203 52.197,82.771
  Bottom Layer w0.508: 52.197,82.771 52.197,73.108 53.365,71.94 v1(53.365,71.501) ; v1(53.315,67.996) 53.403,67.907 53.403,64.665 53.315,64.576 53.315,64.11 55.88,61.544 v1(55.88,60.046) ; v1(55.931,43.967) 55.931,40.843 56.236,40.538 B1.2@56.236,16.007
C0: pad.10 PC-104.H2_13 R1.1 R7.2 | length 77.2
  Top Layer w0.305: v1(29.134,40.919) 30.658,40.919 R1.1@33.147,38.43
  Top Layer w0.33: R7.2@39.192,32.182 45.974,32.182 pad.10@46.025,32.233
  Bottom Layer w0.305: PC-104.H2_13@27.661,88.824 28.982,87.503 28.956,87.477 ; R1.1@33.147,38.43 38.024,38.43 39.243,37.211 R7.2@39.243,32.182
  Bottom Layer w0.33: 28.956,87.477 28.944,87.465 28.944,83.249 27.538,81.844 27.52,81.844 26.81,81.133 26.81,79.753 26.086,79.029 26.086,68.111 22.796,64.821 22.758,64.821 22.758,55.745 26.67,51.834 26.67,43.383 v1(29.134,40.919)
C1: pad.11 PC-104.H2_14 R2.1 R8.2 | length 85.1
  Top Layer w0.305: R2.1@31.521,33.833 R2.1@31.623,33.731 32.791,33.731 34.29,35.23 37.16,35.23
  Top Layer w0.33: 37.16,35.23 38.506,36.576 38.506,38.202 R8.2@39.167,38.862 pad.11@45.491,38.862
  Bottom Layer w0.305: 27.853,37.632 31.623,33.863 31.587,33.852 R2.1@31.521,33.833
  Bottom Layer w0.33: 25.832,42.875 23.724,42.875 20.066,46.533 20.066,71.153 20.625,71.712 20.625,82.55 21.298,83.223 21.298,84.239 22.086,85.027 23.101,85.027 23.838,85.763 23.838,86.779 24.626,87.567 25.641,87.567 26.378,88.303 26.378,89.319 26.415,89.356 ; 25.857,42.875 26.543,42.189 26.543,38.943 27.853,37.632 ; 26.442,89.329 26.442,90.145 PC-104.H2_14@27.661,91.364
C2: pad.13 PC-104.H2_15 R3.1 R9.2 | length 89.7
  Top Layer w0.305: v1(31.42,36.678) R9.2@36.246,36.678
  Top Layer w0.33: R9.2@36.347,36.779 36.347,40.081 37.135,40.869 pad.13@45.187,40.869
  Bottom Layer w0.305: 28.803,80.543 31.039,82.779 31.039,82.822 31.445,83.228 31.445,84.259 31.039,84.665 31.039,85.362 31.445,85.768 31.445,86.799 31.039,87.205 31.039,87.986 PC-104.H2_15@30.201,88.824 ; R3.1@31.648,29.362 36.551,29.362 37.922,30.734 37.922,35.204 R9.2@36.347,36.779
  Bottom Layer w0.33: 28.803,80.543 27.978,79.718 27.978,79.628 27,78.65 27,66.65 24.359,64.008 24.359,56.38 28.816,51.922 28.816,51.011 28.778,50.973 28.778,42.766 30.188,41.356 30.188,37.91 v1(31.42,36.678)
C3: pad.12 PC-104.H2_16 R4.1 R10.2 | length 91.9
  Top Layer w0.305: R4.1@31.598,24.714 34.442,24.714 R10.2@34.671,24.943
  Top Layer w0.33: R10.2@34.671,24.943 36.627,26.899 v1(36.627,33.757) 44.831,33.757 pad.12@45.669,34.595
  Bottom Layer w0.33: PC-104.H2_16@30.201,91.364 31.484,91.364 31.484,90.843 32.246,90.081 35.801,90.081 36.538,89.345 36.538,88.303 36.474,88.24 36.474,86.868 36.538,86.805 36.538,82.436 35.306,81.204 34.679,81.204 30.772,77.297 30.772,60.972 30.823,60.921 30.823,55.594 30.188,54.959 30.188,53.932 30.061,53.805 30.061,42.309 30.772,41.598 30.772,38.816 32.474,37.114 32.474,36.538 35.255,33.757 v1(36.627,33.757)